# Altium PCB PCB.PcbDoc (part 1 of 3)
Units mil, origin at the board's own origin, x right, y up, seen from the top; angles counter-clockwise.
Board outline 2000 x 1595 mil, 2 copper layers (Top Layer, Bottom Layer); 191 components, 134 nets, 778 pads, 0 vias.
Unrouted connection lines stored in the file: 439.
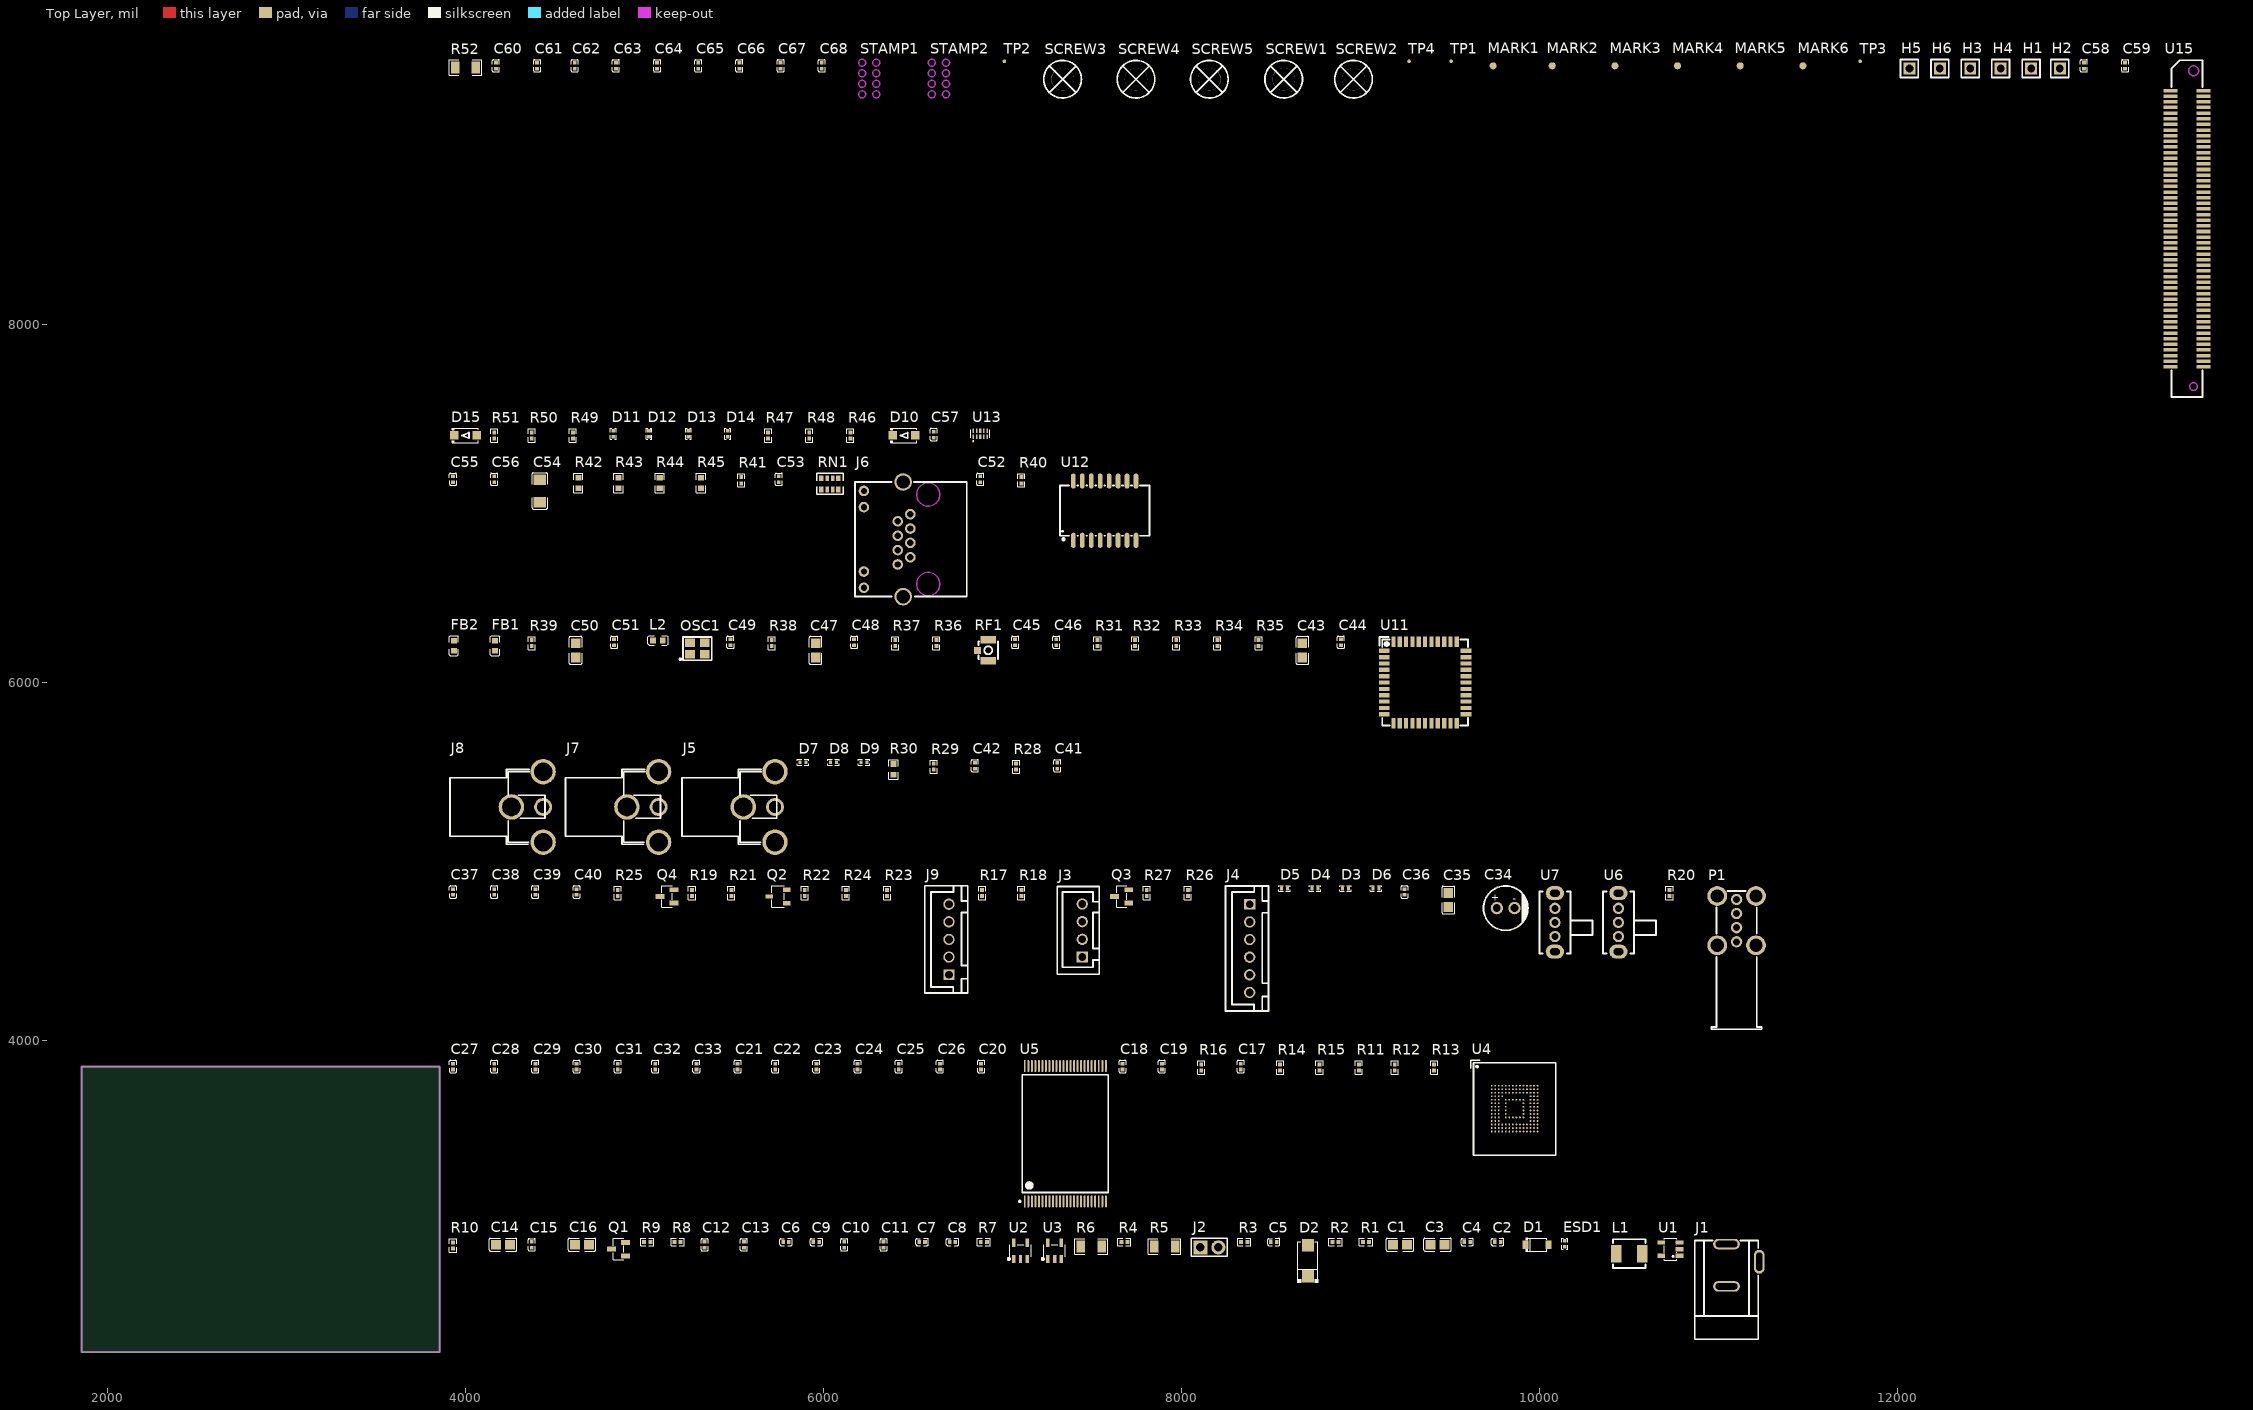
[diagram p0: Top Layer view]
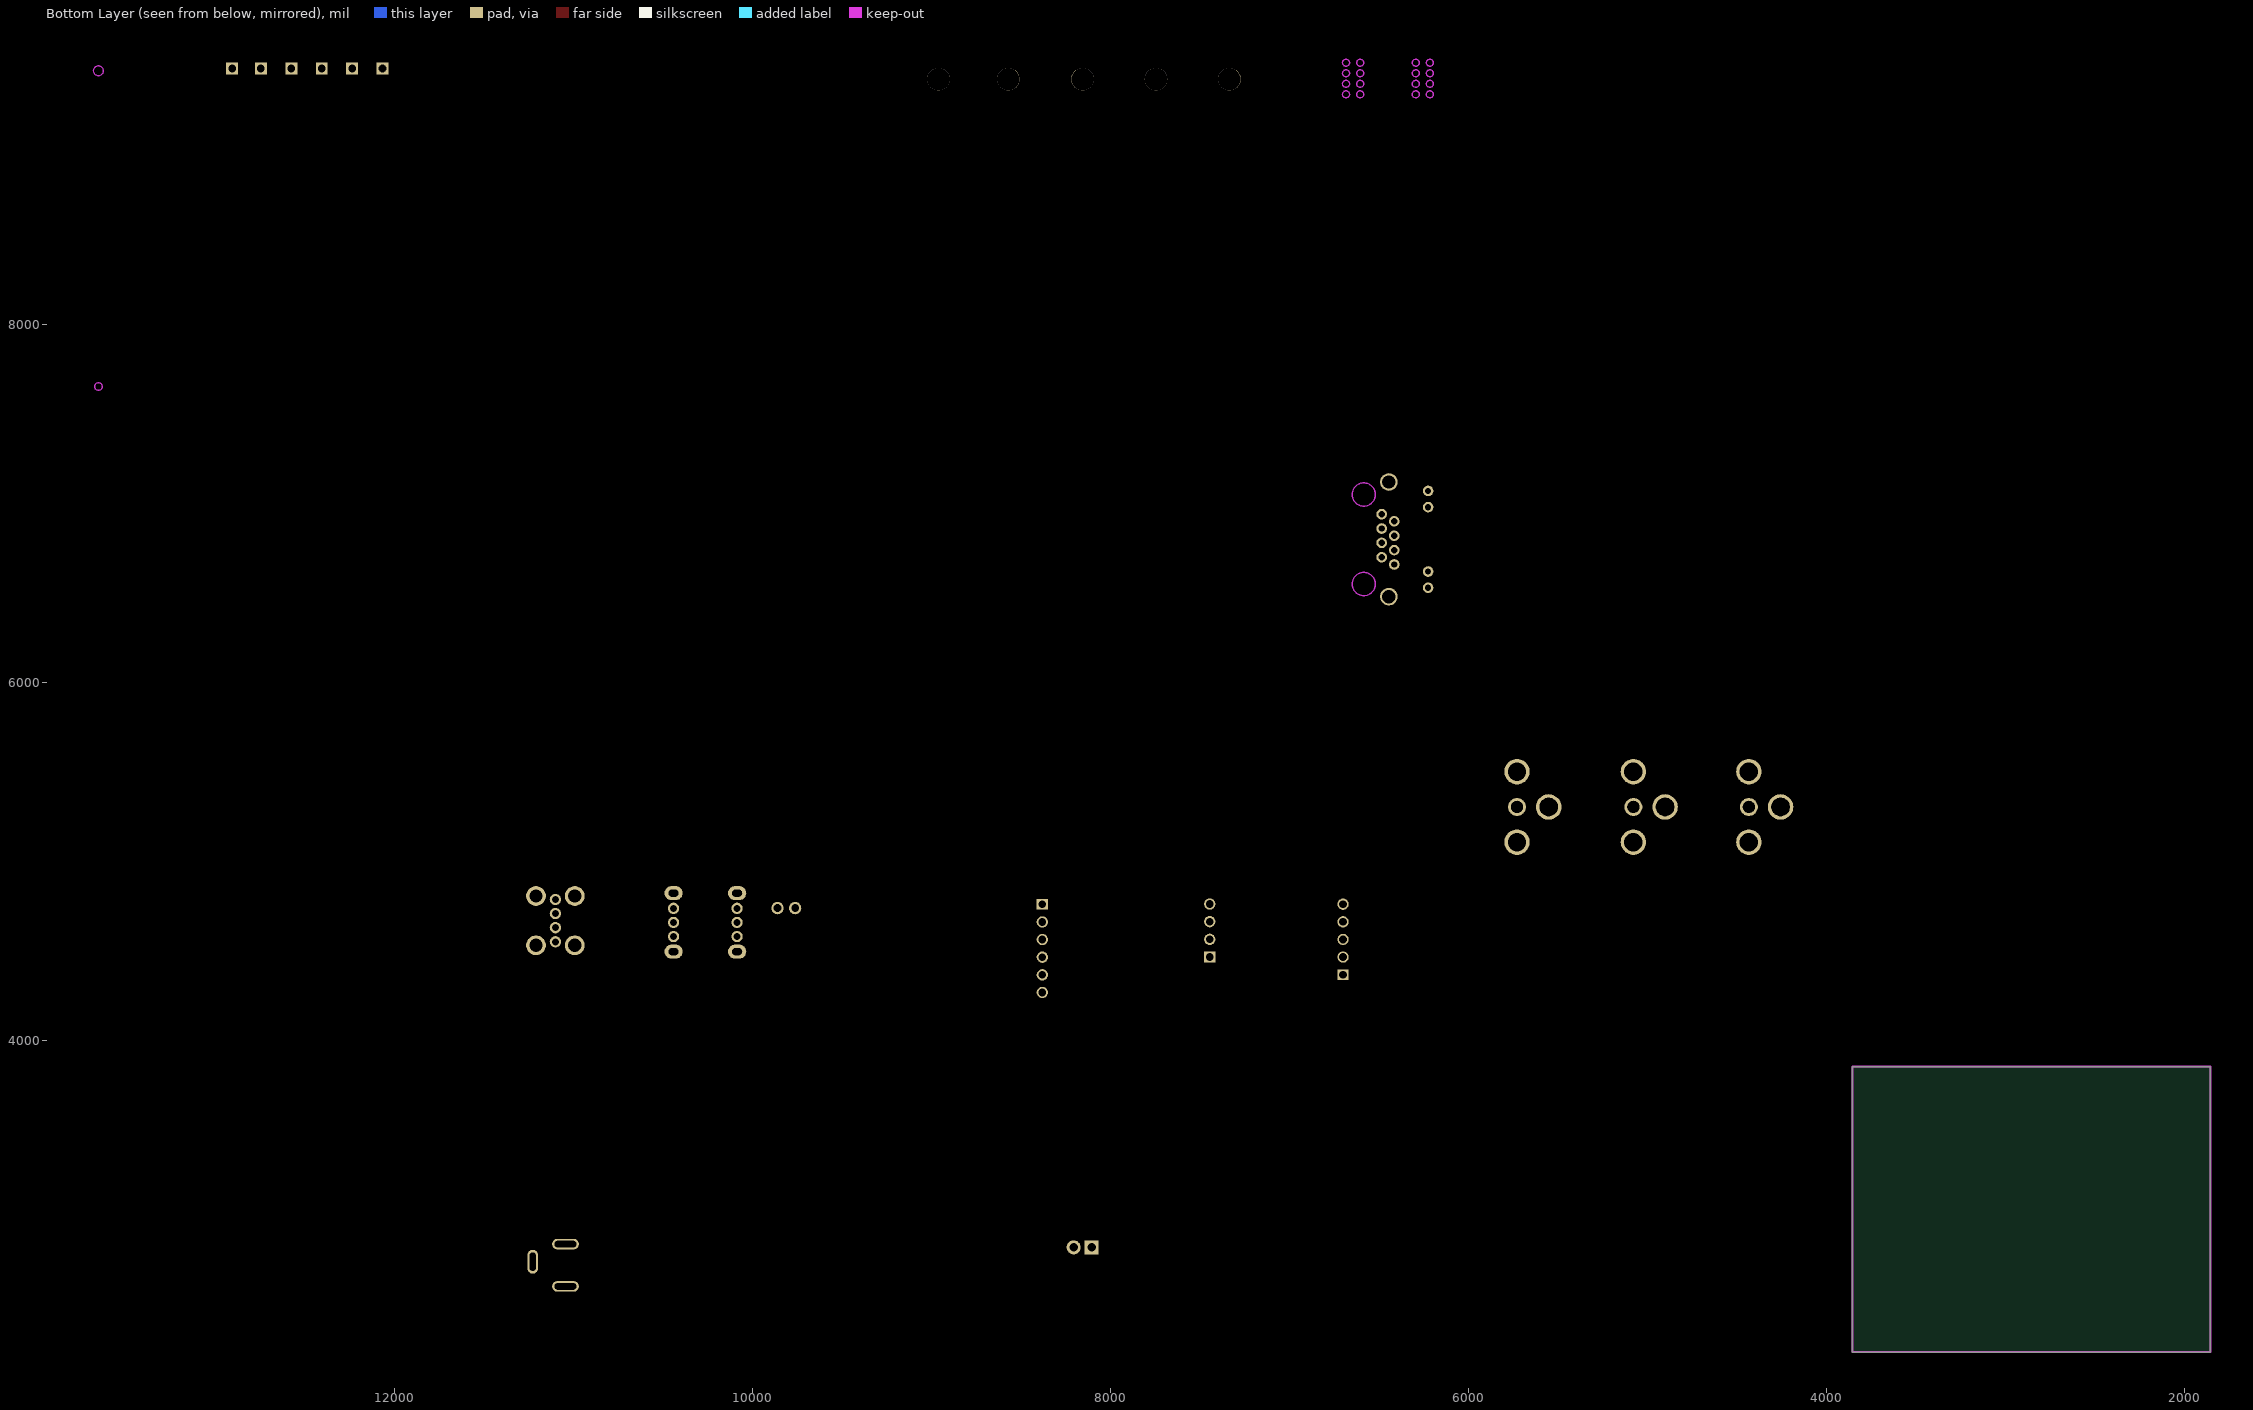
[diagram p1: Bottom Layer view, seen from below]

## Layer stack, top to bottom
Top Solder: solder mask 0.4, Solder Resist, Dk 3.5
Top Layer: signal copper 1.4
Dielectric 1: dielectric 12.6, FR-4, Dk 4.8
Bottom Layer: signal copper 1.4
Bottom Solder: solder mask 0.4, Solder Resist, Dk 3.5

## Board outline
1855,2260 1855,3855 3855,3855 3855,2260

## Design rules (kind name [scope] priority, off if disabled: settings)
Clearance [All] p1: gap=10 ignorepadtopadclearanceinfootprint=FALSE
PolygonConnect [All] p1: connectstyle=Relief reliefconductorwidth=10 reliefentries=4 polygonreliefangle="90 Angle" airgapwidth=10
RoutingVias [All] p1: holewidth=28 width=50 viastyle="Through Hole" minholewidth=28 minwidth=50 maxholewidth=28 maxwidth=50
SolderMaskExpansion [All] p1: expansion=4 istentingtop=FALSE
SupplyNets "Schematic Supply Nets_12" [InNet('VBAT')] p1: voltage=0.000
SupplyNets "Schematic Supply Nets_11" [InNet('+5V')] p2: voltage=0.000
SupplyNets "Schematic Supply Nets_10" [InNet('VDD-IO')] p3: voltage=0.000
SupplyNets "Schematic Supply Nets_9" [InNet('GND')] p4: voltage=0.000
SupplyNets "Schematic Supply Nets_8" [InNet('HDMI-5V')] p5: voltage=0.000
SupplyNets "Schematic Supply Nets_7" [InNet('VCC-IO')] p6: voltage=0.000
SupplyNets "Schematic Supply Nets_6" [InNet('VCC-RTC')] p7: voltage=0.000
SupplyNets "Schematic Supply Nets_5" [InNet('AGND')] p8: voltage=0.000
SupplyNets "Schematic Supply Nets_4" [InNet('AVCC')] p9: voltage=0.000
SupplyNets "Schematic Supply Nets_3" [InNet('VCC-WIFI-IO')] p10: voltage=0.000
SupplyNets "Schematic Supply Nets_2" [InNet('VCC-3V3')] p11: voltage=0.000
SupplyNets "Schematic Supply Nets_1" [InNet('DCIN')] p12: voltage=0.000
SupplyNets "Schematic Supply Nets" [InNet('VCC-5V')] p13: voltage=0.000
Width [All] p1: maxlimit=10 minlimit=10 preferedwidth=10
30 further rules are at their usual default settings.

## Classes and differential pairs
component class 8_BTB: C58 C59 C60 C61 C62 C63 C64 C65 C66 C67 C68 H1 H2 H3 H4 H5 H6 MARK1 MARK2 MARK3 MARK4 MARK5 MARK6 R52 SCREW1 SCREW2 SCREW3 SCREW4 SCREW5 STAMP1 STAMP2 TP1 TP2 TP3 TP4 U15
component class 7_HDMI: C57 D10 D11 D12 D13 D14 D15 R46 R47 R48 R49 R50 R51 U13
component class 6_FE-MISC: C52 C53 C54 C55 C56 J6 R40 R41 R42 R43 R44 R45 RN1 U12
component class 5_WIFI: C43 C44 C45 C46 C47 C48 C49 C50 C51 FB1 FB2 L2 OSC1 R31 R32 R33 R34 R35 R36 R37 R38 R39 RF1 U11
component class 4_AV: C41 C42 D7 D8 D9 J5 J7 J8 R28 R29 R30
component class 3_USB: C34 C35 C36 C37 C38 C39 C40 D3 D4 D5 D6 J3 J4 J9 P1 Q2 Q3 Q4 R17 R18 R19 R20 R21 R22 R23 R24 R25 R26 R27 U6 U7
component class 2_NAND-eMMC: C17 C18 C19 C20 C21 C22 C23 C24 C25 C26 C27 C28 C29 C30 C31 C32 C33 R11 R12 R13 R14 R15 R16 U4 U5
component class 1_PWR: C1 C2 C3 C4 C5 C6 C7 C8 C9 C10 C11 C12 C13 C14 C15 C16 D1 D2 ESD1 J1 J2 L1 Q1 R1 R2 R3 R4 R5 R6 R7 R8 R9 R10 U1 U2 U3

## Components (designator, comment, footprint, x,y, rotation, side; value= is the part's Value field where it differs from the comment)
C1 "10uF" C0805 9220,2860 r0 top
C2 "100nF" C0402 9765,2875 r0 top
C3 "10uF" C0805 9430,2860 r0 top
C4 "100nF" C0402 9595,2875 r0 top
C5 "22pF" C0402 8515,2875 r0 top
C6 "4.7uF" C0402 5790,2875 r0 top
C7 "4.7uF" C0402 6550,2875 r0 top
C8 "100nF" C0402 6720,2875 r0 top
C9 "4.7uF" C0402 5960,2875 r0 top
C10 "4.7uF" C0402 6115,2860 r90 top
C11 "100nF" C0402 6335,2860 r90 top
C12 "NC/10nF" C0402 5335,2860 r90 top
C13 "NC/10nF" C0402 5555,2860 r90 top
C14 "10uF" C0805 4210,2860 r0 top
C15 "100nF" C0402 4370,2860 r90 top
C16 "10uF" C0805 4650,2860 r0 top
C17 "100nF" C0402 8330,3855 r90 top
C18 "100nF" C0402 7670,3855 r90 top
C19 "1uF" C0402 7890,3855 r90 top
C20 "100nF" C0402 6880,3855 r90 top
C21 "1uF" C0402 5520,3855 r90 top
C22 "1uF" C0402 5730,3855 r90 top
C23 "100nF" C0402 5960,3855 r90 top
C24 "100nF" C0402 6190,3855 r90 top
C25 "100nF" C0402 6420,3855 r90 top
C26 "100nF" C0402 6650,3855 r90 top
C27 "1uF" C0402 3930,3855 r90 top
C28 "1uF" C0402 4160,3855 r90 top
C29 "100nF" C0402 4390,3855 r90 top
C30 "100nF" C0402 4620,3855 r90 top
C31 "100nF" C0402 4850,3855 r90 top
C32 "100nF" C0402 5060,3855 r90 top
C33 "100nF" C0402 5290,3855 r90 top
C34 "330uF" CAP-TH_BD6.3-P2.50-D0.6-FD-3 9810,4740 r0 top
C35 "10uF" C0805 9490,4785 r90 top
C36 "100nF" C0402 9245,4830 r90 top
C37 "10pF" C0402 3930,4830 r90 top
C38 "10pF" C0402 4160,4830 r90 top
C39 "10pF" C0402 4390,4830 r90 top
C40 "10pF" C0402 4620,4830 r90 top
C41 "4.7uF" C0402 7305,5535 r90 top
C42 "4.7uF" C0402 6845,5535 r90 top
C43 "10uF" C0805 8675,6180 r90 top
C44 "100nF" C0402 8890,6225 r90 top
C45 "NC/？" C0402 7070,6225 r90 top
C46 "NC/？" C0402 7300,6225 r90 top
C47 "10uF" C0805 5955,6180 r90 top
C48 "100nF" C0402 6170,6225 r90 top
C49 "NC/5.6pF" C0402 5480,6225 r90 top
C50 "10uF" C0805 4615,6180 r90 top
C51 "100nF" C0402 4830,6225 r90 top
C52 "100nF" C0402 6875,7135 r90 top
C53 "100nF" C0402 5750,7135 r90 top
C54 "1uF" C1206 4415,7070 r90 top
C55 "100nF" C0402 3930,7135 r90 top
C56 "100nF" C0402 4160,7135 r90 top
C57 "100nF" C0402 6615,7385 r90 top
C58 "100nF" C0402 13040,9445 r90 top
C59 "1uF" C0402 13270,9445 r90 top
C60 "1uF" C0402 4170,9445 r90 top
C61 "1uF" C0402 4400,9445 r90 top
C62 "100nF" C0402 4610,9445 r90 top
C63 "100nF" C0402 4840,9445 r90 top
C64 "100nF" C0402 5070,9445 r90 top
C65 "100nF" C0402 5300,9445 r90 top
C66 "100nF" C0402 5530,9445 r90 top
C67 "100nF" C0402 5760,9445 r90 top
C68 "100nF" C0402 5990,9445 r90 top
D1 "BZT52C5V6" SOD-123_L2.7-W1.6-LS3.7-RD 9985,2860 r0 top
D2 "1N5819" SMA_L4.4-W2.6-LS5.0-RD 8705,2770 r90 top
D3 "ESD9B5VL-2" DFN1006-2L-BI 8915,4850 r0 top
D4 "ESD9B5VL-2" DFN1006-2L-BI 8745,4850 r0 top
D5 "ESD9B5VL-2" DFN1006-2L-BI 8575,4850 r0 top
D6 "ESD5451X-MS" DFN1006-2L-BI 9085,4850 r0 top
D7 "ESD5451X-MS" DFN1006-2L-BI 5885,5555 r0 top
D8 "ESD5451X-MS" DFN1006-2L-BI 6055,5555 r0 top
D9 "ESD9B5VL-2" DFN1006-2L-BI 6225,5555 r0 top
D10 "XBS104S14" SOD-123FL_L2.8-W1.8-LS3.7-RD 6450,7380 r0 top
D11 "ESD5451X-MS" DFN1006-2L-BI 4825,7390 r90 top
D12 "ESD5451X-MS" DFN1006-2L-BI 5025,7390 r90 top
D13 "ESD5451X-MS" DFN1006-2L-BI 5245,7390 r90 top
D14 "ESD5451X-MS" DFN1006-2L-BI 5465,7390 r90 top
D15 "XBS104S14" SOD-123FL_L2.8-W1.8-LS3.7-RD 4000,7380 r0 top
ESD1 "ESD9B5VL-2" DFN1006-2L-BI 10140,2865 r90 top
FB1 "CBM160808U000T" L0603 4165,6205 r90 top
FB2 "CBM160808U000T" L0603 3935,6205 r90 top
H1 "PZ254V-11-01P" HDR-TH_1P-P2.54-V-M 12745,9430 r0 top
H2 "PZ254V-11-01P" HDR-TH_1P-P2.54-V-M 12905,9430 r0 top
H3 "PZ254V-11-01P" HDR-TH_1P-P2.54-V-M 12405,9430 r0 top
H4 "PZ254V-11-01P" HDR-TH_1P-P2.54-V-M 12575,9430 r0 top
H5 "PZ254V-11-01P" HDR-TH_1P-P2.54-V-M 12065,9430 r0 top
H6 "PZ254V-11-01P" HDR-TH_1P-P2.54-V-M 12235,9430 r0 top
J1 "DC-005-A200" DC-IN-TH_DC-005-A200 11135,2745 r90 top
J2 "PZ254V-11-02P" HDR-TH_2P-P2.54-V-M 8155,2845 r0 top
J3 "ZX-XH2.54-4PZZ" CONN-TH_4P-P2.50_4PIN 7445,4615 r90 top
J4 "ZX-XH2.54-6PZZ" CONN-TH_6P-P2.50_ZX-XH2.54-6PZZ 8380,4515 r90 top
J5 "RCJ-014" CONN-TH_RCJ-013 5640,5305 r0 top
J6 "R-RJ45R08P-C004" RJ45-TH_R-RJ45R08P-C004 6355,6800 r90 top
J7 "RCJ-014" CONN-TH_RCJ-013 4990,5305 r0 top
J8 "RCJ-014" CONN-TH_RCJ-013 4345,5305 r0 top
J9 "ZX-XH2.54-5PZZ" CONN-TH_5P-P2.50_ZX-XH2.54-5PZZ 6700,4565 r90 top
L1 "2.2uH" IND-SMD_L4.6-W4.1_MHCI04015 10500,2810 r0 top
L2 "MMZ1608S121ATA00" L0603 5075,6235 r0 top
MARK1 "" Mark-Point-1mm 9740,9445 r90 top
MARK2 "" Mark-Point-1mm 10070,9445 r90 top
MARK3 "" Mark-Point-1mm 10420,9445 r90 top
MARK4 "" Mark-Point-1mm 10770,9445 r90 top
MARK5 "" Mark-Point-1mm 11120,9445 r90 top
MARK6 "" Mark-Point-1mm 11470,9445 r90 top
OSC1 "YF4024M00033001" OSC-SMD_4P-L3.2-W2.5-BL_1C210000BB0F 5295,6190 r0 top
P1 "USB-226-BRY" USB-A-TH_USB-226-BRY 11100,4670 r0 top
Q1 "AO3423" SOT-23-3_L2.9-W1.3-P1.90-LS2.4-BR-3 4855,2835 r0 top
Q2 "BSN20" SOT-23-3_L2.9-W1.6-P1.90-LS2.8-BR 5745,4805 r0 top
Q3 "MMBT3904" SOT-23-3_L2.9-W1.3-P1.90-LS2.4-BR 7665,4805 r0 top
Q4 "MMBT3904" SOT-23-3_L2.9-W1.3-P1.90-LS2.4-BR 5125,4805 r0 top
R1 "11.8kΩ" R0402 9030,2875 r0 top
R2 "150kΩ" R0402 8860,2875 r0 top
R3 "11.8kΩ" R0402 8350,2875 r0 top
R4 "33kΩ" R0402 7680,2875 r0 top
R5 "1Ω 1206" R1206 7905,2850 r0 top
R6 "0Ω 1206" R1206 7495,2850 r0 top
R7 "0Ω" R0402 6895,2875 r0 top
R8 "0Ω" R0402 5185,2875 r0 top
R9 "10kΩ" R0402 5015,2875 r0 top
R10 "100kΩ" R0402 3930,2855 r90 top
R11 "10kΩ" R0402 8990,3850 r90 top
R12 "0Ω" R0402 9190,3850 r90 top
R13 "0Ω" R0402 9410,3850 r90 top
R14 "10kΩ" R0402 8550,3850 r90 top
R15 "0Ω" R0402 8770,3850 r90 top
R16 "10kΩ" R0402 8110,3850 r90 top
R17 "10kΩ" R0402 6885,4825 r90 top
R18 "10kΩ" R0402 7105,4825 r90 top
R19 "10kΩ" R0402 5265,4825 r90 top
R20 "10kΩ" R0402 10725,4825 r90 top
R21 "0Ω" R0402 5485,4825 r90 top
R22 "0Ω" R0402 5895,4825 r90 top
R23 "0Ω" R0402 6355,4825 r90 top
R24 "100kΩ" R0402 6125,4825 r90 top
R25 "100kΩ" R0402 4850,4825 r90 top
R26 "330Ω" R0402 8035,4825 r90 top
R27 "330Ω" R0402 7805,4825 r90 top
R28 "0Ω" R0402 7075,5530 r90 top
R29 "0Ω" R0402 6615,5530 r90 top
R30 "75Ω" R0603 6390,5515 r90 top
R31 "30kΩ" R0402 7530,6220 r90 top
R32 "30kΩ" R0402 7740,6220 r90 top
R33 "30kΩ" R0402 7970,6220 r90 top
R34 "30kΩ" R0402 8200,6220 r90 top
R35 "30kΩ" R0402 8430,6220 r90 top
R36 "0Ω" R0402 6630,6220 r90 top
R37 "0Ω" R0402 6400,6220 r90 top
R38 "33Ω" R0402 5710,6220 r90 top
R39 "22Ω" R0402 4370,6220 r90 top
R40 "330Ω" R0402 7105,7130 r90 top
R41 "330Ω" R0402 5540,7130 r90 top
R42 "75Ω" R0603 4630,7115 r90 top
R43 "75Ω" R0603 4855,7115 r90 top
R44 "75Ω" R0603 5085,7115 r90 top
R45 "75Ω" R0603 5315,7115 r90 top
R46 "20kΩ" R0402 6150,7380 r90 top
R47 "1.8kΩ" R0402 5690,7380 r90 top
R48 "1.8kΩ" R0402 5920,7380 r90 top
R49 "27kΩ" R0402 4600,7380 r90 top
R50 "0Ω" R0402 4370,7380 r90 top
R51 "27kΩ" R0402 4160,7380 r90 top
R52 "0Ω 1206" R1206 4000,9435 r0 top
RF1 "6GHz" IPEX-SMD_BWIPX-1-001E 6890,6180 r0 top
RN1 "0Ω" RES-ARRAY-SMD_0603-8P-L3.2-W1.6-BL 6035,7110 r0 top
SCREW1 "" SIP-1A 8570,9370 r90 top
SCREW2 "" SIP-1A 8960,9370 r90 top
SCREW3 "" SIP-1A 7335,9370 r90 top
SCREW4 "" SIP-1A 7745,9370 r90 top
SCREW5 "" SIP-1A 8155,9370 r90 top
STAMP1 "" youpiaokong 6215,9285 r90 top
STAMP2 "" youpiaokong 6605,9285 r90 top
TP1 "" Test-Point-0.5mm 9505,9470 r90 top
TP2 "" Test-Point-0.5mm 7010,9470 r90 top
TP3 "" Test-Point-0.5mm 11790,9470 r90 top
TP4 "" Test-Point-0.5mm 9270,9470 r90 top
U1 "LP3220SAB5F" SOT-23-5_L3.0-W1.7-P0.95-LS2.8-BR 10730,2835 r0 top
U2 "LP3987H-33B5F" SOT-23-5_L3.0-W1.7-P0.95-LS2.8-BL 7100,2825 r0 top
U3 "LP3987H-33B5F" SOT-23-5_L3.0-W1.7-P0.95-LS2.8-BL 7290,2825 r0 top
U4 "KLM8G1GETF-B041" FBGA-153_L13.0-W11.5-P0.50_KLMAG1JETD-B041 9860,3620 r0 top
U5 "MT29F4G08ABADAWP:D" TSOP-48_L18.5-W12.2-P0.50-LS20.0-TL 7350,3480 r90 top
U6 "HX SK12D07VG3" SW-TH_SK12D07VG3 10440,4660 r90 top
U7 "HX SK12D07VG3" SW-TH_SK12D07VG3 10085,4660 r90 top
U11 "XR829 module 24MHz" WIRELM-SMD_XR829-MODULE-24MHZ 9360,6000 r0 top
U12 "350uH" XFMR-SMD_16P-L12.7-W7.1-P1.27-LS9.4-BL 7570,6960 r0 top
U13 "AZ1045-04F" DFN2510-10_L2.5-W1.0-P0.50-BL 6875,7390 r0 top
U15 "FX6-100P-0.8SV(71)" CONN-SMD_100P-P0.80_FX6-100P-0.8SV71 13615,8535 r90 top

## Footprints (in the part's own frame and the unit in brackets; to place one, negate y for a bottom-side part, rotate by r counter-clockwise, add the part's x,y. Pads: shape width x height; smd on the part's side, far side on the other; paste and mask are expansions set on the pad)
C0402 [mil]
  rect 19.7x21.3 smd: 1(-16.5,0) 2(16.5,0)
  silkscreen extent -34,-20 34,20
C0805 [mil]
  rect 55.5x53.1 smd paste-3937 mask+2: 1(-39.4,0) 2(39.4,0)
  silkscreen extent -77,-36 77,36
C1206 [mil]
  rect 58.5x68 smd paste-3937 mask+2: 1(-62.7,0) 2(62.7,0)
  silkscreen extent -101,-43 101,43
CAP-TH_BD6.3-P2.50-D0.6-FD-3 [mil]
  round 68.9 hole 43.3 paste-99999 mask+2: 1(-49.2,0) 2(49.2,0)
  silkscreen extent -124,-124 126,124
CONN-SMD_100P-P0.80_FX6-100P-0.8SV71 [mil]
  rect 19.7x78.7 smd paste+0 mask+2: 1(771.7,-92.5) 2(771.7,92.5) 3(740.2,-92.5) 4(740.2,92.5) 5(708.7,-92.5) 6(708.7,92.5) 7(677.2,-92.5) 8(677.2,92.5) 9(645.7,-92.5) 10(645.7,92.5) 11(614.2,-92.5) 12(614.2,92.5) 13(582.7,-92.5) 14(582.7,92.5) 15(551.2,-92.5) 16(551.2,92.5) 17(519.7,-92.5) 18(519.7,92.5) 19(488.2,-92.5) 20(488.2,92.5) 21(456.7,-92.5) 22(456.7,92.5) 23(425.2,-92.5) 24(425.2,92.5) 25(393.7,-92.5) 26(393.7,92.5) 27(362.2,-92.5) 28(362.2,92.5) 29(330.7,-92.5) 30(330.7,92.5) 31(299.2,-92.5) 32(299.2,92.5) 33(267.7,-92.5) 34(267.7,92.5) 35(236.2,-92.5) 36(236.2,92.5) 37(204.7,-92.5) 38(204.7,92.5) 39(173.3,-92.5) 40(173.3,92.5) 41(141.8,-92.5) 42(141.8,92.5) 43(110.3,-92.5) 44(110.3,92.5) 45(78.8,-92.5) 46(78.8,92.5) 47(47.3,-92.5) 48(47.3,92.5) 49(15.8,-92.5) 50(15.8,92.5) 51(-15.7,-92.5) 52(-15.7,92.5) 53(-47.2,-92.5) 54(-47.2,92.5) 55(-78.7,-92.5) 56(-78.7,92.5) 57(-110.2,-92.5) 58(-110.2,92.5) 59(-141.7,-92.5) 60(-141.7,92.5) 61(-173.2,-92.5) 62(-173.2,92.5) 63(-204.7,-92.5) 64(-204.7,92.5) 65(-236.2,-92.5) 66(-236.2,92.5) 67(-267.7,-92.5) 68(-267.7,92.5) 69(-299.2,-92.5) 70(-299.2,92.5) 71(-330.7,-92.5) 72(-330.7,92.5) 73(-362.2,-92.5) 74(-362.2,92.5) 75(-393.7,-92.5) 76(-393.7,92.5) 77(-425.2,-92.5) 78(-425.2,92.5) 79(-456.7,-92.5) 80(-456.7,92.5) 81(-488.2,-92.5) 82(-488.2,92.5) 83(-519.7,-92.5) 84(-519.7,92.5) 85(-551.2,-92.5) 86(-551.2,92.5) 87(-582.7,-92.5) 88(-582.7,92.5) 89(-614.1,-92.5) 90(-614.1,92.5) 91(-645.6,-92.5) 92(-645.6,92.5) 93(-677.1,-92.5) 94(-677.1,92.5) 95(-708.6,-92.5) 96(-708.6,92.5) 97(-740.1,-92.5) 98(-740.1,92.5) 99(-771.6,-92.5) 100(-771.6,92.5)
  Keep-Out Layer circle w0.1: c881.9,-37.4 r27.6
  Keep-Out Layer circle w0.1: c-881.9,-37.4 r21.7
  Keep-Out Layer region: 909.5,-37.4 909.5,-41.03 907.62,-48.05 903.99,-54.35 898.85,-59.49 892.55,-63.12 885.53,-65 878.27,-65 871.25,-63.12 864.95,-59.49 859.81,-54.35 856.18,-48.05 854.3,-41.03 854.3,-37.4 854.3,-33.77 856.18,-26.75 859.81,-20.45 864.95,-15.31 871.25,-11.68 878.27,-9.8 885.53,-9.8 892.55,-11.68 898.85,-15.31 903.99,-20.45 907.62,-26.75 909.5,-33.77 909.5,-37.4 909.5,-37.4
  Keep-Out Layer region: 909.5,-37.4 909.5,-41.03 907.62,-48.05 903.99,-54.35 898.85,-59.49 892.55,-63.12 885.53,-65 878.27,-65 871.25,-63.12 864.95,-59.49 859.81,-54.35 856.18,-48.05 854.3,-41.03 854.3,-37.4 854.3,-33.77 856.18,-26.75 859.81,-20.45 864.95,-15.31 871.25,-11.68 878.27,-9.8 885.53,-9.8 892.55,-11.68 898.85,-15.31 903.99,-20.45 907.62,-26.75 909.5,-33.77 909.5,-37.4 909.5,-37.4
  Keep-Out Layer region: -860.2,-37.4 -860.2,-41.72 -863.5,-49.69 -869.61,-55.8 -877.58,-59.1 -886.22,-59.1 -894.19,-55.8 -900.3,-49.69 -903.6,-41.72 -903.6,-37.4 -903.6,-33.08 -900.3,-25.11 -894.19,-19 -886.22,-15.7 -877.58,-15.7 -869.61,-19 -863.5,-25.11 -860.2,-33.08 -860.2,-37.4 -860.2,-37.4
  Keep-Out Layer region: -860.2,-37.4 -860.2,-41.72 -863.5,-49.69 -869.61,-55.8 -877.58,-59.1 -886.22,-59.1 -894.19,-55.8 -900.3,-49.69 -903.6,-41.72 -903.6,-37.4 -903.6,-33.08 -900.3,-25.11 -894.19,-19 -886.22,-15.7 -877.58,-15.7 -869.61,-19 -863.5,-25.11 -860.2,-33.08 -860.2,-37.4 -860.2,-37.4
  silkscreen extent -941,-87 941,87
CONN-TH_4P-P2.50_4PIN [mil]
  rect 60x63 hole 43.3: 1(-147.7,0)
  round 63 hole 43.3: 2(-49.3,0) 3(49.2,0) 4(147.6,0)
  silkscreen extent -245,-95 245,140
CONN-TH_5P-P2.50_ZX-XH2.54-5PZZ [mil]
  rect 60x63 hole 43.3: 1(-196.9,0)
  round 63 hole 43.3: 2(-98.5,0) 3(0,0) 4(98.4,0) 5(196.8,0)
  silkscreen extent -300,-105 300,135
CONN-TH_6P-P2.50_ZX-XH2.54-6PZZ [mil]
  rect 60x63 hole 43.3: 1(246.1,0)
  round 63 hole 43.3: 2(147.7,0) 3(49.2,0) 4(-49.2,0) 5(-147.6,0) 6(-246,0)
  silkscreen extent -349,-106 349,135
CONN-TH_RCJ-013 [mil]
  round 142.4 hole 102.4 slot 102.6 at 0 deg: 1(-88.5,0)
  round 141.7 hole 102.4 paste-99999 mask+2: 1(88.6,-196.8) 1(88.6,196.9)
  round 100.4 hole 66.9: 2(88.6,0)
  silkscreen extent -431,-209 98,209
DC-IN-TH_DC-005-A200 [mil]
  oval 59.1x149.6 hole 35.4 slot 122.1 at 90 deg: 1(118.2,91.5) 2(-118.1,91.5)
  oval 133.9x59.1 hole 35.4 slot 102.4 at 0 deg: 3(19.7,-91.5)
  silkscreen extent -413,-86 138,269
DFN1006-2L-BI [mil]
  rect 17.7x21.7 smd: 1(-16.7,0) 2(16.7,0)
  silkscreen extent -32,-16 32,16
DFN2510-10_L2.5-W1.0-P0.50-BL [mil]
  rect 7.9x26.2 smd paste-3937 mask+2: 1(-39.4,-17.1) 2(-19.7,-17.1) 4(19.7,-17.1) 5(39.4,-17.1) 6(39.4,17) 7(19.7,17) 9(-19.7,17) 10(-39.4,17)
  rect 15.7x26.2 smd paste-3937 mask+2: 3(0,-17.1) 8(0,17)
  silkscreen extent -52,-44 52,23
FBGA-153_L13.0-W11.5-P0.50_KLMAG1JETD-B041 [mil]
  round 9.8 smd paste-3937 mask+2: A1(-127.9,127.9) A2(-108.2,127.9) A3(-88.6,127.9) A4(-68.9,127.9) A5(-49.2,127.9) A6(-29.5,127.9) A7(-9.8,127.9) A8(9.9,127.9) A9(29.6,127.9) A10(49.2,127.9) A11(68.9,127.9) A12(88.6,127.9) A13(108.3,127.9) A14(128,127.9) B1(-127.9,108.2) B2(-108.2,108.2) B3(-88.6,108.2) B4(-68.9,108.2) B5(-49.2,108.2) B6(-29.5,108.2) B7(-9.8,108.2) B8(9.9,108.2) B9(29.6,108.2) B10(49.2,108.2) B11(68.9,108.2) B12(88.6,108.2) B13(108.3,108.2) B14(128,108.2) C1(-127.9,88.6) C2(-108.2,88.6) C3(-88.6,88.6) C4(-68.9,88.6) C5(-49.2,88.6) C6(-29.5,88.6) C7(-9.8,88.6) C8(9.9,88.6) C9(29.6,88.6) C10(49.2,88.6) C11(68.9,88.6) C12(88.6,88.6) C13(108.3,88.6) C14(128,88.6) D1(-127.9,68.9) D2(-108.2,68.9) D3(-88.6,68.9) D4(-68.9,68.9) D12(88.6,68.9) D13(108.3,68.9) D14(128,68.9) E1(-127.9,49.2) E2(-108.2,49.2) E3(-88.6,49.2) E5(-49.2,49.2) E6(-29.5,49.2) E7(-9.8,49.2) E8(9.9,49.2) E9(29.6,49.2) E10(49.2,49.2) E12(88.6,49.2) E13(108.3,49.2) E14(128,49.2) F1(-127.9,29.5) F2(-108.2,29.5) F3(-88.6,29.5) F5(-49.2,29.5) F10(49.2,29.5) F12(88.6,29.5) F13(108.3,29.5) F14(128,29.5) G1(-127.9,9.8) G2(-108.2,9.8) G3(-88.6,9.8) G5(-49.2,9.8) G10(49.2,9.8) G12(88.6,9.8) G13(108.3,9.8) G14(128,9.8) H1(-127.9,-9.9) H2(-108.2,-9.9) H3(-88.6,-9.9) H5(-49.2,-9.9) H10(49.2,-9.9) H12(88.6,-9.9) H13(108.3,-9.9) H14(128,-9.9) J1(-127.9,-29.5) J2(-108.2,-29.5) J3(-88.6,-29.5) J5(-49.2,-29.5) J10(49.2,-29.5) J12(88.6,-29.5) J13(108.3,-29.5) J14(128,-29.5) K1(-127.9,-49.2) K2(-108.2,-49.2) K3(-88.6,-49.2) K5(-49.2,-49.2) K6(-29.5,-49.2) K7(-9.8,-49.2) K8(9.9,-49.2) K9(29.6,-49.2) K10(49.2,-49.2) K12(88.6,-49.2) K13(108.3,-49.2) K14(128,-49.2) L1(-127.9,-68.9) L2(-108.2,-68.9) L3(-88.6,-68.9) L12(88.6,-68.9) L13(108.3,-68.9) L14(128,-68.9) M1(-127.9,-88.6) M2(-108.2,-88.6) M3(-88.6,-88.6) M4(-68.9,-88.6) M5(-49.2,-88.6) M6(-29.5,-88.6) M7(-9.8,-88.6) M8(9.9,-88.6) M9(29.6,-88.6) M10(49.2,-88.6) M11(68.9,-88.6) M12(88.6,-88.6) M13(108.3,-88.6) M14(128,-88.6) N1(-127.9,-108.3) N2(-108.2,-108.3) N3(-88.6,-108.3) N4(-68.9,-108.3) N5(-49.2,-108.3) N6(-29.5,-108.3) N7(-9.8,-108.3) N8(9.9,-108.3) N9(29.6,-108.3) N10(49.2,-108.3) N11(68.9,-108.3) N12(88.6,-108.3) N13(108.3,-108.3) N14(128,-108.3) P1(-127.9,-128) P2(-108.2,-128) P3(-88.6,-128) P4(-68.9,-128) P5(-49.2,-128) P6(-29.5,-128) P7(-9.8,-128) P8(9.9,-128) P9(29.6,-128) P10(49.2,-128) P11(68.9,-128) P12(88.6,-128) P13(108.3,-128) P14(128,-128)
  silkscreen extent -245,-260 230,270
HDR-TH_1P-P2.54-V-M [mil]
  rect 66.9x66.9 hole 43.3: 1(0,0)
  silkscreen extent -50,-50 50,50
HDR-TH_2P-P2.54-V-M [mil]
  rect 78.7x78.7 hole 47.2: 1(-50,0)
  round 78.7 hole 47.2: 2(50,0)
  silkscreen extent -100,-50 100,50
IND-SMD_L4.6-W4.1_MHCI04015 [mil]
  rect 59.1x98.4 smd: 1(-72.9,0) 2(72.8,0)
  silkscreen extent -91,-81 90,81
IPEX-SMD_BWIPX-1-001E [mil]
  rect 41.3x39.4 smd: 1(-30.1,0)
  rect 86.6x41.3 smd: 2(30,-58) 3(30,58.1)
  silkscreen extent -25,-50 85,50
L0603 [mil]
  rect 31.5x34 smd paste-3937 mask+2: 1(-27.6,0) 2(27.5,0)
  silkscreen extent -56,-26 56,26
Mark-Point-1mm [mil]
  round 39.4 smd paste-1000 mask+19.7: 1(0,0)
OSC-SMD_4P-L3.2-W2.5-BL_1C210000BB0F [mil]
  rect 55.1x47.2 smd paste+0 mask+2: 1(-41.3,-31.5) 2(41.3,-31.5) 3(41.3,31.5) 4(-41.3,31.5)
  silkscreen extent -100,-65 80,65
R0402 [mil]
  rect 22.3x21.3 smd paste-3937 mask+2: 1(-17.1,0) 2(17,0)
  silkscreen extent -37,-20 37,20
R0603 [mil]
  rect 31.8x34 smd paste-3937 mask+2: 1(-29.6,0) 2(29.7,0)
  silkscreen extent -54,-26 54,26
R1206 [mil]
  rect 47.5x67 smd paste-3937 mask+2: 1(-58.2,0) 2(58.2,0)
  silkscreen extent -91,-42 91,42
RES-ARRAY-SMD_0603-8P-L3.2-W1.6-BL [mil]
  rect 25.6x31.5 smd paste+0 mask+2: 1(-47.3,-31.5) 4(47.2,-31.5) 5(47.2,31.5) 8(-47.3,31.5)
  rect 19.7x31.5 smd paste+0 mask+2: 2(-15.8,-31.5) 3(15.7,-31.5) 6(15.7,31.5) 7(-15.8,31.5)
  silkscreen extent -74,-57 74,58
RJ45-TH_R-RJ45R08P-C004 [mil]
  round 59.1 hole 35.4 paste-99999 mask+2: 1(140.5,-129.7) 2(100.4,-59.6) 3(60.2,-129.7) 4(20.1,-59.6) 5(-20.1,-129.7) 6(-60.3,-59.6) 7(-100.4,-129.7) 8(-140.6,-59.6) 9(-270.1,129.7) 10(-179.9,129.7) 11(179.9,129.7) 12(270.1,129.7)
  round 98.4 hole 74.8 paste-99999 mask+2: 13(320.1,-89.6) 14(-320.1,-89.6)
  Keep-Out Layer circle w0.1: c-250,-229.7 r65
  Keep-Out Layer circle w0.1: c250,-229.7 r65
  Keep-Out Layer region: -185,-229.7 -185,-236.1 -187.5,-248.66 -192.4,-260.49 -199.51,-271.14 -208.56,-280.19 -219.21,-287.3 -231.04,-292.2 -243.6,-294.7 -256.4,-294.7 -268.96,-292.2 -280.79,-287.3 -291.44,-280.19 -300.49,-271.14 -307.6,-260.49 -312.5,-248.66 -315,-236.1 -315,-229.7 -315,-223.3 -312.5,-210.74 -307.6,-198.91 -300.49,-188.27 -291.44,-179.21 -280.79,-172.1 -268.96,-167.2 -256.4,-164.7 -243.6,-164.7 -231.04,-167.2 -219.21,-172.1 -208.56,-179.21 -199.51,-188.27 -192.4,-198.91 -187.5,-210.74 -185,-223.3 -185,-229.7 -185.1,-229.7
  Keep-Out Layer region: -185,-229.7 -185,-236.1 -187.5,-248.66 -192.4,-260.49 -199.51,-271.14 -208.56,-280.19 -219.21,-287.3 -231.04,-292.2 -243.6,-294.7 -256.4,-294.7 -268.96,-292.2 -280.79,-287.3 -291.44,-280.19 -300.49,-271.14 -307.6,-260.49 -312.5,-248.66 -315,-236.1 -315,-229.7 -315,-223.3 -312.5,-210.74 -307.6,-198.91 -300.49,-188.27 -291.44,-179.21 -280.79,-172.1 -268.96,-167.2 -256.4,-164.7 -243.6,-164.7 -231.04,-167.2 -219.21,-172.1 -208.56,-179.21 -199.51,-188.27 -192.4,-198.91 -187.5,-210.74 -185,-223.3 -185,-229.7 -185.1,-229.7
  Keep-Out Layer region: 315,-229.7 315,-236.1 312.5,-248.66 307.6,-260.49 300.49,-271.14 291.44,-280.19 280.79,-287.3 268.96,-292.2 256.4,-294.7 243.6,-294.7 231.04,-292.2 219.21,-287.3 208.56,-280.19 199.51,-271.14 192.4,-260.49 187.5,-248.66 185,-236.1 185,-229.7 185,-223.3 187.5,-210.74 192.4,-198.91 199.51,-188.27 208.56,-179.21 219.21,-172.1 231.04,-167.2 243.6,-164.7 256.4,-164.7 268.96,-167.2 280.79,-172.1 291.44,-179.21 300.49,-188.27 307.6,-198.91 312.5,-210.74 315,-223.3 315,-229.7 314.9,-229.7
  Keep-Out Layer region: 315,-229.7 315,-236.1 312.5,-248.66 307.6,-260.49 300.49,-271.14 291.44,-280.19 280.79,-287.3 268.96,-292.2 256.4,-294.7 243.6,-294.7 231.04,-292.2 219.21,-287.3 208.56,-280.19 199.51,-271.14 192.4,-260.49 187.5,-248.66 185,-236.1 185,-229.7 185,-223.3 187.5,-210.74 192.4,-198.91 199.51,-188.27 208.56,-179.21 219.21,-172.1 231.04,-167.2 243.6,-164.7 256.4,-164.7 268.96,-167.2 280.79,-172.1 291.44,-179.21 300.49,-188.27 307.6,-198.91 312.5,-210.74 315,-223.3 315,-229.7 314.9,-229.7
  silkscreen extent -320,-445 320,180
SIP-1A [mil]
  round 126 hole 126 paste-99999 mask+4: 1(0,0)
  silkscreen extent -105,-105 105,105
SMA_L4.4-W2.6-LS5.0-RD [mil]
  rect 70.9x66.9 smd: 1(-86.3,0) 2(86.3,0)
  silkscreen extent -122,-58 107,58
SOD-123_L2.7-W1.6-LS3.7-RD [mil]
  rect 35.8x48 smd: 1(-64.4,0) 2(64.3,0)
  silkscreen extent -63,-40 54,39
SOD-123FL_L2.8-W1.8-LS3.7-RD [mil]
  rect 47.2x47.2 smd: 1(-63,0) 2(63,0)
  silkscreen extent -75,-39 71,39
SOT-23-3_L2.9-W1.3-P1.90-LS2.4-BR [mil]
  rect 49.2x27.6 smd: 1(39.4,-37.4) 2(39.4,37.4) 3(-39.3,0)
  silkscreen extent -29,-60 29,60
SOT-23-3_L2.9-W1.3-P1.90-LS2.4-BR-3 [mil]
  rect 49.2x27.6 smd: 1(39.4,-37.4) 2(39.4,37.4) 3(-39.4,0)
  silkscreen extent -29,-60 29,60
SOT-23-3_L2.9-W1.6-P1.90-LS2.8-BR [mil]
  rect 42.1x23.6 smd: 1(48.6,-37.4) 2(48.6,37.4) 3(-48.7,0)
  silkscreen extent -35,-60 34,60
SOT-23-5_L3.0-W1.7-P0.95-LS2.8-BL [mil]
  rect 19.3x45.6 smd: 1(-37.4,-45.4) 2(0,-45.4) 3(37.4,-45.4)
  rect 19.3x46.3 smd: 4(37.4,45.4) 5(-37.4,45.4)
  silkscreen extent -71,-51 60,34
SOT-23-5_L3.0-W1.7-P0.95-LS2.8-BR [mil]
  rect 43.3x23.6 smd: 1(51.2,-37.4) 2(51.2,0) 3(51.2,37.4) 4(-51.2,37.4) 5(-51.2,-37.4)
  silkscreen extent -35,-61 35,61
SW-TH_SK12D07VG3 [mil]
  round 63 hole 39.4: 1(-78.8,0) 2(0,0) 3(78.7,0)
  oval 78.7x102.4 hole 39.4 slot 55.1 at 90 deg: 4(163.4,0) 5(-163.4,0)
  silkscreen extent -173,-210 173,87
Test-Point-0.5mm [mil]
  round 19.7 smd: 1(0,0)
TSOP-48_L18.5-W12.2-P0.50-LS20.0-TL [mil]
  oval 66.9x11 smd mask+2: 1(-378,226.4) 2(-378,206.7) 3(-378,187) 4(-378,167.3) 5(-378,147.6) 6(-378,127.9) 7(-378,108.3) 8(-378,88.6) 9(-378,68.9) 10(-378,49.2) 11(-378,29.5) 12(-378,9.8) 13(-378,-9.9) 14(-378,-29.5) 15(-378,-49.2) 16(-378,-68.9) 17(-378,-88.6) 18(-378,-108.3) 19(-378,-128) 20(-378,-147.7) 21(-378,-167.3) 22(-378,-187) 23(-378,-206.7) 24(-378,-226.4) 25(377.9,-226.4) 26(377.9,-206.7) 27(377.9,-187) 28(377.9,-167.3) 29(377.9,-147.7) 30(377.9,-128) 31(377.9,-108.3) 32(377.9,-88.6) 33(377.9,-68.9) 34(377.9,-49.2) 35(377.9,-29.5) 36(377.9,-9.9) 37(377.9,9.8) 38(377.9,29.5) 39(377.9,49.2) 40(377.9,68.9) 41(377.9,88.6) 42(377.9,108.3) 43(377.9,127.9) 44(377.9,147.6) 45(377.9,167.3) 46(377.9,187) 47(377.9,206.7) 48(377.9,226.4)
  silkscreen extent -383,-240 329,259
USB-A-TH_USB-226-BRY [mil]
  round 63 hole 39.4: 1(0,-118.1) 2(0,-39.3) 3(0,39.4) 4(0,118.1)
  round 110.2 hole 74.8: 5(-108.3,-137.8) 5(-108.3,137.8) 5(108.3,-137.8) 5(108.3,137.8)
  silkscreen extent -140,-606 140,165
WIRELM-SMD_XR829-MODULE-24MHZ [mm]
  rect 1.501x0.599 smd: 1(-5.801,4.501) 2(-5.801,3.602) 3(-5.801,2.7) 4(-5.801,1.801) 5(-5.801,0.902) 6(-5.801,0) 7(-5.801,-0.899) 8(-5.801,-1.798) 9(-5.801,-2.7) 10(-5.801,-3.599) 11(-5.801,-4.498) 23(5.799,-4.498) 24(5.799,-3.599) 25(5.799,-2.7) 26(5.799,-1.798) 27(5.799,-0.899) 28(5.799,0) 29(5.799,0.902) 30(5.799,1.801) 31(5.799,2.7) 32(5.799,3.602) 33(5.799,4.501)
  rect 0.599x1.501 smd: 12(-4.501,-5.799) 13(-3.599,-5.799) 14(-2.7,-5.799) 15(-1.801,-5.799) 16(-0.899,-5.799) 17(0,-5.799) 18(0.899,-5.799) 19(1.801,-5.799) 20(2.7,-5.799) 21(3.599,-5.799) 22(4.501,-5.799) 34(4.501,5.801) 35(3.599,5.801) 36(2.7,5.801) 37(1.801,5.801) 38(0.899,5.801) 39(0,5.801) 40(-0.899,5.801) 41(-1.801,5.801) 42(-2.7,5.801) 43(-3.599,5.801) 44(-4.501,5.801)
  silkscreen extent -6.48,-6.1 6.1,6.48
XFMR-SMD_16P-L12.7-W7.1-P1.27-LS9.4-BL [mil]
  oval 26.5x84.5 smd: 1(-175,-165.5) 2(-125,-165.5) 3(-75,-165.5) 4(-25,-165.5) 5(25,-165.5) 6(75,-165.5) 7(125,-165.5) 8(175,-165.5) 9(175,165.5) 10(125,165.5) 11(75,165.5) 12(25,165.5) 13(-25,165.5) 14(-75,165.5) 15(-125,165.5) 16(-175,165.5)
  silkscreen extent -250,-166 250,140
youpiaokong [mil]
  Keep-Out Layer circle w0.1: c177.2,-78.8 r19.7
  Keep-Out Layer circle w0.1: c118.1,-78.8 r19.7
  Keep-Out Layer circle w0.1: c59,-78.8 r19.7
  Keep-Out Layer circle w0.1: c0,-78.8 r19.7
  Keep-Out Layer circle w0.1: c177.2,0 r19.7
  Keep-Out Layer circle w0.1: c118.1,0 r19.7
  Keep-Out Layer circle w0.1: c59,0 r19.7
  Keep-Out Layer circle w0.1: c0,0 r19.7
  Keep-Out Layer region: 196.9,-78.8 196.9,-82.72 193.9,-89.96 188.36,-95.5 181.12,-98.5 173.28,-98.5 166.04,-95.5 160.5,-89.96 157.5,-82.72 157.5,-78.8 157.5,-74.88 160.5,-67.64 166.04,-62.1 173.28,-59.1 181.12,-59.1 188.36,-62.1 193.9,-67.64 196.9,-74.88 196.9,-78.8 196.8,-78.8
  Keep-Out Layer region: 196.9,-78.8 196.9,-82.72 193.9,-89.96 188.36,-95.5 181.12,-98.5 173.28,-98.5 166.04,-95.5 160.5,-89.96 157.5,-82.72 157.5,-78.8 157.5,-74.88 160.5,-67.64 166.04,-62.1 173.28,-59.1 181.12,-59.1 188.36,-62.1 193.9,-67.64 196.9,-74.88 196.9,-78.8 196.8,-78.8
  Keep-Out Layer region: 137.8,-78.8 137.8,-82.72 134.8,-89.96 129.26,-95.5 122.02,-98.5 114.18,-98.5 106.94,-95.5 101.4,-89.96 98.4,-82.72 98.4,-78.8 98.4,-74.88 101.4,-67.64 106.94,-62.1 114.18,-59.1 122.02,-59.1 129.26,-62.1 134.8,-67.64 137.8,-74.88 137.8,-78.8 137.8,-78.8
  Keep-Out Layer region: 137.8,-78.8 137.8,-82.72 134.8,-89.96 129.26,-95.5 122.02,-98.5 114.18,-98.5 106.94,-95.5 101.4,-89.96 98.4,-82.72 98.4,-78.8 98.4,-74.88 101.4,-67.64 106.94,-62.1 114.18,-59.1 122.02,-59.1 129.26,-62.1 134.8,-67.64 137.8,-74.88 137.8,-78.8 137.8,-78.8
  Keep-Out Layer region: 78.7,-78.8 78.7,-82.72 75.7,-89.96 70.16,-95.5 62.92,-98.5 55.08,-98.5 47.84,-95.5 42.3,-89.96 39.3,-82.72 39.3,-78.8 39.3,-74.88 42.3,-67.64 47.84,-62.1 55.08,-59.1 62.92,-59.1 70.16,-62.1 75.7,-67.64 78.7,-74.88 78.7,-78.8 78.7,-78.8
  Keep-Out Layer region: 78.7,-78.8 78.7,-82.72 75.7,-89.96 70.16,-95.5 62.92,-98.5 55.08,-98.5 47.84,-95.5 42.3,-89.96 39.3,-82.72 39.3,-78.8 39.3,-74.88 42.3,-67.64 47.84,-62.1 55.08,-59.1 62.92,-59.1 70.16,-62.1 75.7,-67.64 78.7,-74.88 78.7,-78.8 78.7,-78.8
  Keep-Out Layer region: 19.7,-78.8 19.7,-82.72 16.7,-89.96 11.16,-95.5 3.92,-98.5 -3.92,-98.5 -11.16,-95.5 -16.7,-89.96 -19.7,-82.72 -19.7,-78.8 -19.7,-74.88 -16.7,-67.64 -11.16,-62.1 -3.92,-59.1 3.92,-59.1 11.16,-62.1 16.7,-67.64 19.7,-74.88 19.7,-78.8 19.7,-78.8
  Keep-Out Layer region: 19.7,-78.8 19.7,-82.72 16.7,-89.96 11.16,-95.5 3.92,-98.5 -3.92,-98.5 -11.16,-95.5 -16.7,-89.96 -19.7,-82.72 -19.7,-78.8 -19.7,-74.88 -16.7,-67.64 -11.16,-62.1 -3.92,-59.1 3.92,-59.1 11.16,-62.1 16.7,-67.64 19.7,-74.88 19.7,-78.8 19.7,-78.8
  Keep-Out Layer region: 196.9,0 196.9,-3.92 193.9,-11.16 188.36,-16.7 181.12,-19.7 173.28,-19.7 166.04,-16.7 160.5,-11.16 157.5,-3.92 157.5,0 157.5,3.92 160.5,11.16 166.04,16.7 173.28,19.7 181.12,19.7 188.36,16.7 193.9,11.16 196.9,3.92 196.9,0 196.8,0
  Keep-Out Layer region: 196.9,0 196.9,-3.92 193.9,-11.16 188.36,-16.7 181.12,-19.7 173.28,-19.7 166.04,-16.7 160.5,-11.16 157.5,-3.92 157.5,0 157.5,3.92 160.5,11.16 166.04,16.7 173.28,19.7 181.12,19.7 188.36,16.7 193.9,11.16 196.9,3.92 196.9,0 196.8,0
  Keep-Out Layer region: 137.8,0 137.8,-3.92 134.8,-11.16 129.26,-16.7 122.02,-19.7 114.18,-19.7 106.94,-16.7 101.4,-11.16 98.4,-3.92 98.4,0 98.4,3.92 101.4,11.16 106.94,16.7 114.18,19.7 122.02,19.7 129.26,16.7 134.8,11.16 137.8,3.92 137.8,0 137.8,0
  Keep-Out Layer region: 137.8,0 137.8,-3.92 134.8,-11.16 129.26,-16.7 122.02,-19.7 114.18,-19.7 106.94,-16.7 101.4,-11.16 98.4,-3.92 98.4,0 98.4,3.92 101.4,11.16 106.94,16.7 114.18,19.7 122.02,19.7 129.26,16.7 134.8,11.16 137.8,3.92 137.8,0 137.8,0
  Keep-Out Layer region: 78.7,0 78.7,-3.92 75.7,-11.16 70.16,-16.7 62.92,-19.7 55.08,-19.7 47.84,-16.7 42.3,-11.16 39.3,-3.92 39.3,0 39.3,3.92 42.3,11.16 47.84,16.7 55.08,19.7 62.92,19.7 70.16,16.7 75.7,11.16 78.7,3.92 78.7,0 78.7,0
  Keep-Out Layer region: 78.7,0 78.7,-3.92 75.7,-11.16 70.16,-16.7 62.92,-19.7 55.08,-19.7 47.84,-16.7 42.3,-11.16 39.3,-3.92 39.3,0 39.3,3.92 42.3,11.16 47.84,16.7 55.08,19.7 62.92,19.7 70.16,16.7 75.7,11.16 78.7,3.92 78.7,0 78.7,0
  Keep-Out Layer region: 19.7,0 19.7,-3.92 16.7,-11.16 11.16,-16.7 3.92,-19.7 -3.92,-19.7 -11.16,-16.7 -16.7,-11.16 -19.7,-3.92 -19.7,0 -19.7,3.92 -16.7,11.16 -11.16,16.7 -3.92,19.7 3.92,19.7 11.16,16.7 16.7,11.16 19.7,3.92 19.7,0 19.7,0
  Keep-Out Layer region: 19.7,0 19.7,-3.92 16.7,-11.16 11.16,-16.7 3.92,-19.7 -3.92,-19.7 -11.16,-16.7 -16.7,-11.16 -19.7,-3.92 -19.7,0 -19.7,3.92 -16.7,11.16 -11.16,16.7 -3.92,19.7 3.92,19.7 11.16,16.7 16.7,11.16 19.7,3.92 19.7,0 19.7,0